# Altium PCB encoder_breakout.PcbDoc
Units mil, origin at the board's own origin, x right, y up, seen from the top; angles counter-clockwise.
Board outline 985 x 655 mil, 2 copper layers (Top Layer, Bottom Layer); 4 components, 5 nets, 19 pads, 2 vias.
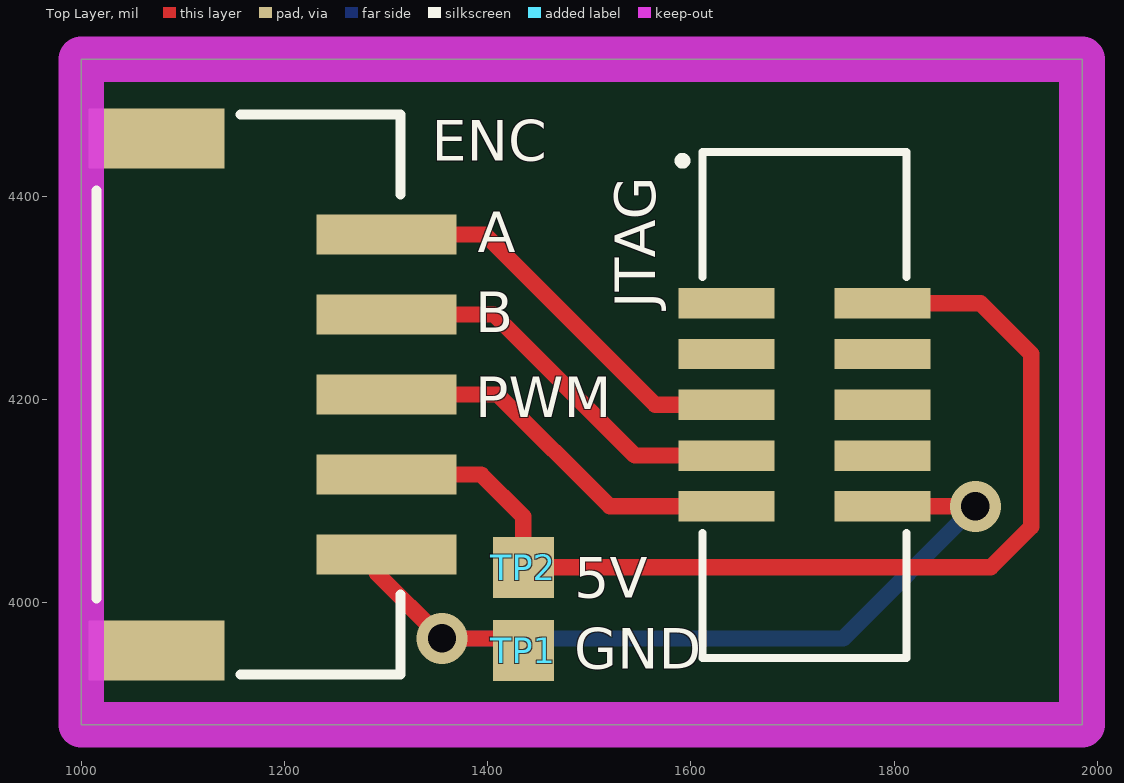
[diagram p0: Top Layer view]
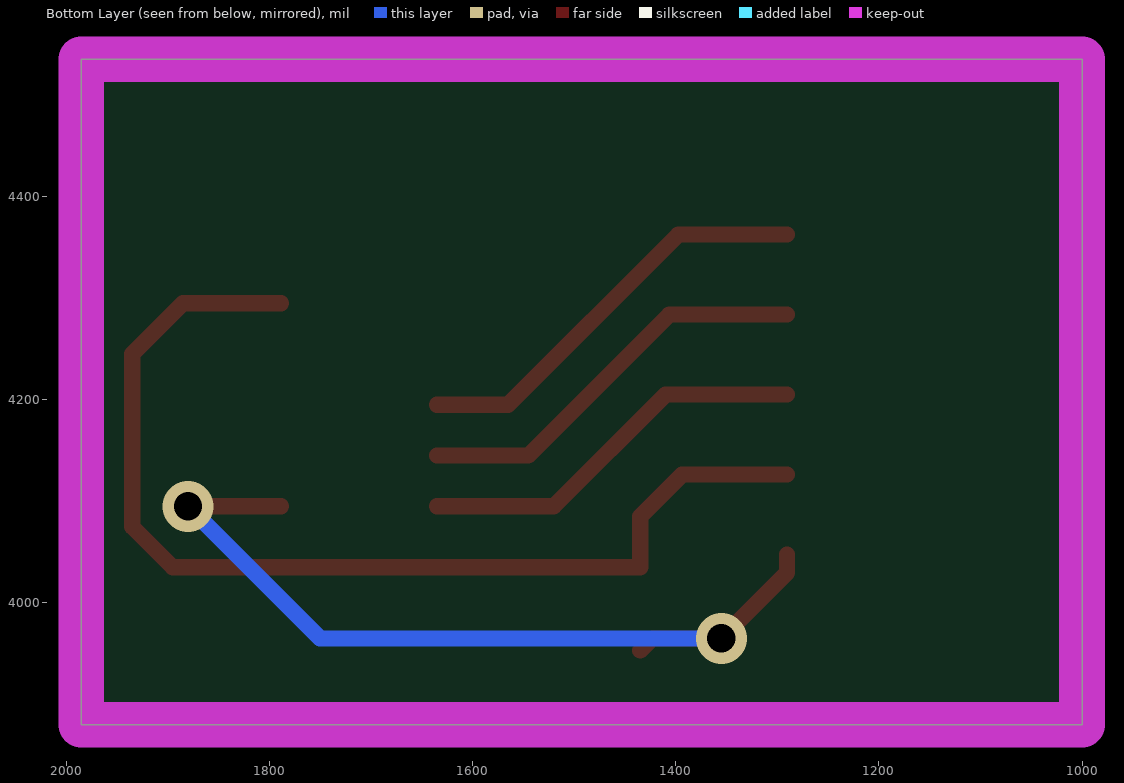
[diagram p1: Bottom Layer view, seen from below]

## Layer stack, top to bottom
Top Solder: solder mask 0.4, Solder Resist, Dk 3.5
Top Layer: signal copper 1.4
Dielectric 1: dielectric 12.6, FR-4, Dk 4.8
Bottom Layer: signal copper 1.4
Bottom Solder: solder mask 0.4, Solder Resist, Dk 3.5

## Board outline
1000,3880 1985,3880 1985,4535 1000,4535

## Design rules (kind name [scope] priority, off if disabled: settings)
Clearance [All] p1: gap=10 ignorepadtopadclearanceinfootprint=FALSE except(0: Arc-Hole Track-Hole SMDPad-Hole THPad-Hole Via-Hole Fill-Hole Poly-Hole Region-Hole Text-Hole; 16: Arc-Arc Arc-Track Arc-SMDPad Arc-THPad Arc-Via Arc-Fill Arc-Poly Arc-Region Track-Track Track-SMDPad Track-THPad Track-Via Track-Fill Track-Poly Track-Region)
HoleSize [All] p1: absolutevalues=TRUE maxlimit=100 minlimit=16 maxpercent=80.000 minpercent=20.000
PolygonConnect [All] p1: connectstyle=Relief reliefconductorwidth=10 reliefentries=4 polygonreliefangle="90 Angle" airgapwidth=10
RoutingVias [All] p1: holewidth=28 width=50 viastyle="Through Hole" minholewidth=28 minwidth=50 maxholewidth=28 maxwidth=50
SolderMaskExpansion [All] p1: expansion=4
Width [All] p1: maxlimit=20 minlimit=16 preferedwidth=16
29 further rules are at their usual default settings.

## Components (designator, comment, footprint, x,y, rotation, side; value= is the part's Value field where it differs from the comment)
ENC "To board" JST-S5B-SM4-TB 1015,4205 r270 top
JTAG "CON_IDC_2x5" "IDC HEADER" 1711.77,4195 r0 top
TP1 "GND" TESTPOINT 1435,3953.03 r0 top
TP2 "5V" TESTPOINT 1435,4035 r90 top

## Footprints (in the part's own frame and the unit in brackets; to place one, negate y for a bottom-side part, rotate by r counter-clockwise, add the part's x,y. Pads: shape width x height; smd on the part's side, far side on the other; paste and mask are expansions set on the pad)
"IDC HEADER" [mm]
  rect 2.4x0.76 smd: 1(-1.95,2.54) 2(-1.95,1.27) 3(-1.95,0) 4(-1.95,-1.27) 5(-1.95,-2.54) 6(1.95,-2.54) 7(1.95,-1.27) 8(1.95,0) 9(1.95,1.27) 10(1.95,2.54)
  silkscreen extent -3.12,-6.32 2.55,6.32
JST-S5B-SM4-TB [mm]
  rect 1x3.5 smd: 1(-4,7.25) 2(-2,7.25) 3(0,7.25) 4(2,7.25) 5(4,7.25)
  rect 1.5x3.4 smd: 6(-6.4,1.5) 7(6.4,1.5)
  silkscreen extent -7,0 7,7.6
TESTPOINT [mil]
  rect 60x60 smd: 1(0,0)

## Part data
ENC: library part CON_5M
TP1 TP2: library part *, "TESTPOINT_SMD"

## Via types
v1: diameter 50, hole 28, Top Layer to Bottom Layer, 2 vias

## Nets (pads, with @x,y where several pads share a name; then routed paths per layer and width w, separated by ;. In a path a pad name is that pad's centre, name@x,y a point inside that pad or via, vN(x,y) a via of type N, cw(c..) or ccw(c..) an arc to the next point about the centre after c; other vN are vias at no path point)
NetENC_1: ENC.1 JTAG.3 | length 413.9
  Top Layer w16: ENC.1@1290.43,4362.48 1397.52,4362.48 1565,4195 JTAG.3
NetENC_2: ENC.2 JTAG.4 | length 402
  Top Layer w16: ENC.2@1290.43,4283.74 1406.26,4283.74 1545,4145 JTAG.4
NetENC_3: ENC.3 JTAG.5 | length 390.1
  Top Layer w16: ENC.3@1290.43,4205 1410,4205 1520,4095 JTAG.5
NetENC_4: ENC.4 JTAG.10 TP2.1 | length 1065.4
  Top Layer w16: ENC.4@1290.43,4126.26 ENC.4 1393.74,4126.26 1435,4085 TP2.1 1895,4035 1935,4075 1935,4245 1885,4295 JTAG.10
NetENC_5: ENC.5 JTAG.6 TP1.1 | length 864.5
  Top Layer w16: ENC.5@1290.43,4047.52 1290.43,4029.57 v1(1355,3965) 1423.03,3965 TP1.1 ; JTAG.6 v1(1880,4095)
  Bottom Layer w16: v1(1355,3965) 1750,3965 v1(1880,4095)
pads on no net: ENC.6 ENC.7 JTAG.1 JTAG.2 JTAG.7 JTAG.8 JTAG.9

## Keep-outs
Keep-Out Layer:
  the board outline again, w45

## Silkscreen, mask and mechanical layers (free items; w line width, h text height)
Top Overlay:
  text "A" at 1390,4345 h40
  text "B" at 1387.48,4266.26 h40
  text "PWM" at 1387.48,4182.52 h40

## Text inside footprints (layer, text, board x,y; h text height)
ENC: Mechanical 1 "BOARD EDGE" at 971.69,4311.3 h20 r270